# Altium PCB 64 Electrode Wafer.PcbDoc
Units mm, origin at the board's own origin, x right, y up, seen from the top; angles counter-clockwise.
Board outline 10 x 10 mm, 2 copper layers (Top Layer, Bottom Layer); 2 components, 65 nets, 130 pads, 0 vias.
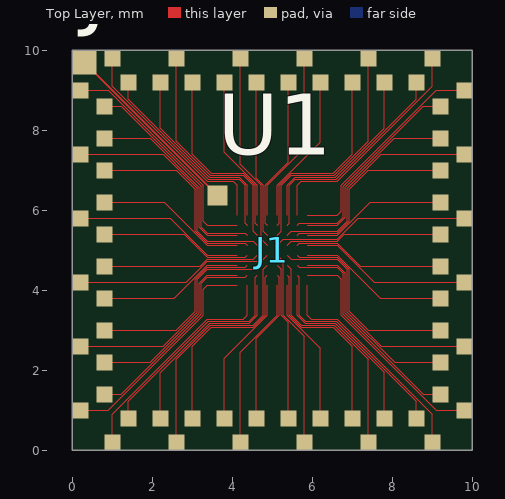
[diagram p0: Top Layer view]
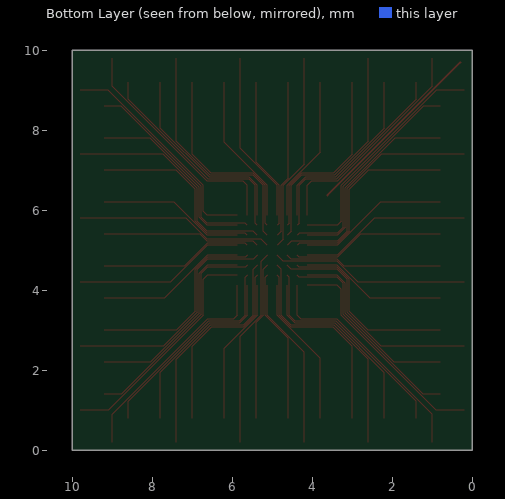
[diagram p1: Bottom Layer view, seen from below]

## Layer stack, top to bottom
Top Solder: solder mask 0.0102, Solder Resist, Dk 3.5
Top Layer: signal copper 0.0356
Dielectric 1: dielectric 0.32, FR-4, Dk 4.8
Bottom Layer: signal copper 0.0356
Bottom Solder: solder mask 0.0102, Solder Resist, Dk 3.5

## Board outline
0,0 10,0 10,10 0,10

## Design rules (kind name [scope] priority, off if disabled: settings)
Clearance [All] p1: gap=0.254 ignorepadtopadclearanceinfootprint=TRUE except(0: Arc-Hole Track-Hole SMDPad-Hole THPad-Hole Via-Hole Fill-Hole Poly-Hole Region-Hole Text-Hole; 0.005: Arc-Arc Arc-Track Arc-SMDPad Track-Track Track-SMDPad)
ComponentClearance [All] p1: gap=0 collisioncheckmode=3 verticalgap=0 showdistances=FALSE
PolygonConnect [All] p1: connectstyle=Relief reliefconductorwidth=0.254 reliefentries=4 polygonreliefangle="90 Angle" airgapwidth=0.254
RoutingVias [All] p1: holewidth=0.711 width=1.27 viastyle="Through Hole" minholewidth=0.711 minwidth=1.27 maxholewidth=0.711 maxwidth=1.27
SolderMaskExpansion [All] p1: expansion=0.102 istentingtop=FALSE
Width [All] p1: maxlimit=0.1 minlimit=0.006 preferedwidth=0.006 bottomlayer_maxwidth=0.006 minimp=50.000000 maximp=50.000000 favimp=50.000000
29 further rules are at their usual default settings.

## Components (designator, comment, footprint, x,y, rotation, side; value= is the part's Value field where it differs from the comment)
J1 "Bond Pads (64)" "Bond Pads (64)" 0,0 r0 top
U1 "Sensing Electrodes (64)" "Sensing Area (64)" 4.125,5.875 r0 top

## Footprints (in the part's own frame and the unit in brackets; to place one, negate y for a bottom-side part, rotate by r counter-clockwise, add the part's x,y. Pads: shape width x height; smd on the part's side, far side on the other; paste and mask are expansions set on the pad)
"Bond Pads (64)" [mm]
  rect 0.4x0.4 smd mask+0: 1(1,9.8) 2(1.4,9.2) 3(2.2,9.2) 4(2.6,9.8) 5(3,9.2) 6(3.8,9.2) 7(4.2,9.8) 8(4.6,9.2) 9(5.4,9.2) 10(5.8,9.8) 11(6.2,9.2) 12(7,9.2) 13(7.4,9.8) 14(7.8,9.2) 15(8.6,9.2) 16(9,9.8) 17(9.8,9) 18(9.2,8.6) 19(9.2,7.8) 20(9.8,7.4) 21(9.2,7) 22(9.2,6.2) 23(9.8,5.8) 24(9.2,5.4) 25(9.2,4.6) 26(9.8,4.2) 27(9.2,3.8) 28(9.2,3) 29(9.8,2.6) 30(9.2,2.2) 31(9.2,1.4) 32(9.8,1) 33(9,0.2) 34(8.6,0.8) 35(7.8,0.8) 36(7.4,0.2) 37(7,0.8) 38(6.2,0.8) 39(5.8,0.2) 40(5.4,0.8) 41(4.6,0.8) 42(4.2,0.2) 43(3.8,0.8) 44(3,0.8) 45(2.6,0.2) 46(2.2,0.8) 47(1.4,0.8) 48(1,0.2) 49(0.2,1) 50(0.8,1.4) 51(0.8,2.2) 52(0.2,2.6) 53(0.8,3) 54(0.8,3.8) 55(0.2,4.2) 56(0.8,4.6) 57(0.8,5.4) 58(0.2,5.8) 59(0.8,6.2) 60(0.8,7) 61(0.2,7.4) 62(0.8,7.8) 63(0.8,8.6) 64(0.2,9)
  rect 0.6x0.6 smd mask+0: 65(0.3,9.7)
"Sensing Area (64)" [mm]
  round 0.01 smd mask+0.102: 1(0,0) 2(0.25,0) 3(0.5,0) 4(0.75,0) 5(1,0) 6(1.25,0) 7(1.5,0) 8(1.75,0) 9(0,-0.25) 10(0.25,-0.25) 11(0.5,-0.25) 12(0.75,-0.25) 13(1,-0.25) 14(1.25,-0.25) 15(1.5,-0.25) 16(1.75,-0.25) 17(0,-0.5) 18(0.25,-0.5) 19(0.5,-0.5) 20(0.75,-0.5) 21(1,-0.5) 22(1.25,-0.5) 23(1.5,-0.5) 24(1.75,-0.5) 25(0,-0.75) 26(0.25,-0.75) 27(0.5,-0.75) 28(0.75,-0.75) 29(1,-0.75) 30(1.25,-0.75) 31(1.5,-0.75) 32(1.75,-0.75) 33(0,-1) 34(0.25,-1) 35(0.5,-1) 36(0.75,-1) 37(1,-1) 38(1.25,-1) 39(1.5,-1) 40(1.75,-1) 41(0,-1.25) 42(0.25,-1.25) 43(0.5,-1.25) 44(0.75,-1.25) 45(1,-1.25) 46(1.25,-1.25) 47(1.5,-1.25) 48(1.75,-1.25) 49(0,-1.5) 50(0.25,-1.5) 51(0.5,-1.5) 52(0.75,-1.5) 53(1,-1.5) 54(1.25,-1.5) 55(1.5,-1.5) 56(1.75,-1.5) 57(0,-1.75) 58(0.25,-1.75) 59(0.5,-1.75) 60(0.75,-1.75) 61(1,-1.75) 62(1.25,-1.75) 63(1.5,-1.75) 64(1.75,-1.75)
  rect 0.5x0.5 smd mask+0.102: 65(-0.5,0.5)

## Part data
J1: "64 bond pads for 64 channel wafer", Part Number="Bond Pads (64)"
U1: library part "64 Electrode Sensing Area", "64 Electrodes covering a 2 mm by 2 mm sensing area", Part Number="64 Electrode Sensing Area"

## Nets (pads, with @x,y where several pads share a name; then routed paths per layer and width w, separated by ;. In a path a pad name is that pad's centre, name@x,y a point inside that pad or via, vN(x,y) a via of type N, cw(c..) or ccw(c..) an arc to the next point about the centre after c; other vN are vias at no path point)
NetJ1_1: J1.1 U1.1 | length 5.6
  Top Layer w0.006: J1.1 1,9.1 3.375,6.725 4.025,6.725 4.125,6.625 U1.1
NetJ1_2: J1.3 U1.2 | length 4.7
  Top Layer w0.006: J1.3 2.2,8.05 3.425,6.825 4.175,6.825 4.375,6.625 U1.2
NetJ1_3: J1.6 U1.3 | length 3.7
  Top Layer w0.006: J1.6 3.8,7.45 4.625,6.625 U1.3
NetJ1_4: J1.10 U1.4 | length 4.3
  Top Layer w0.006: U1.4 4.875,6.623 5.8,7.548 5.8,9.55 J1.10
NetJ1_5: J1.11 U1.5 | length 3.8
  Top Layer w0.006: U1.5 5.125,6.625 6.2,7.7 J1.11
NetJ1_6: J1.14 U1.6 | length 4.9
  Top Layer w0.006: U1.6 5.375,6.625 5.575,6.825 6.57,6.825 7.8,8.055 J1.14
NetJ1_7: J1.16 U1.7 | length 5.9
  Top Layer w0.006: U1.7 5.625,6.625 5.725,6.725 6.625,6.725 9,9.1 J1.16
NetJ1_8: J1.17 U1.8 | length 5.6
  Top Layer w0.006: U1.8 6.625,5.875 6.725,5.975 6.725,6.625 9.1,9 J1.17
NetJ1_9: J1.64 U1.9 | length 5.9
  Top Layer w0.006: J1.64 0.9,9 3.275,6.625 3.275,5.725 3.375,5.625 U1.9
NetJ1_10: J1.2 U1.10 | length 5.3
  Top Layer w0.006: J1.2 1.4,8.775 3.4,6.775 4.175,6.775 4.325,6.625 4.325,5.675 U1.10
NetJ1_11: J1.5 U1.11 | length 4.7
  Top Layer w0.006: J1.5 3,7.4 3.475,6.925 4.275,6.925 4.575,6.625 4.575,5.675 U1.11
NetJ1_12: J1.9 U1.12 | length 3.8
  Top Layer w0.006: U1.12 4.825,5.675 4.825,6.625 5.4,7.2 J1.9
NetJ1_13: J1.12 U1.13 | length 5
  Top Layer w0.006: U1.13 5.175,5.675 5.175,6.625 5.475,6.925 6.525,6.925 7,7.4 J1.12
NetJ1_14: J1.15 U1.14 | length 5.5
  Top Layer w0.006: U1.14 5.425,5.675 5.425,6.625 5.575,6.775 6.6,6.775 8.6,8.775 J1.15
NetJ1_15: J1.18 U1.15 | length 5.3
  Top Layer w0.006: U1.15 5.675,5.675 6.625,5.675 6.775,5.825 6.775,6.6 8.775,8.6 J1.18
NetJ1_16: J1.19 U1.16 | length 4.7
  Top Layer w0.006: U1.16 6.625,5.625 6.825,5.825 6.825,6.575 8.05,7.8 J1.19
NetJ1_17: J1.62 U1.17 | length 4.9
  Top Layer w0.006: J1.62 1.945,7.8 3.175,6.57 3.175,5.575 3.375,5.375 U1.17
NetJ1_18: J1.63 U1.18 | length 5.5
  Top Layer w0.006: J1.63 1.225,8.6 3.225,6.6 3.225,5.575 3.375,5.425 4.325,5.425 U1.18
NetJ1_19: J1.4 U1.19 | length 5.7
  Top Layer w0.006: J1.4 2.6,7.725 3.45,6.875 4.275,6.875 4.525,6.625 4.525,5.475 U1.19
NetJ1_20: J1.8 U1.20 | length 3.9
  Top Layer w0.006: J1.8 4.6,6.8 4.775,6.625 4.775,5.475 U1.20
NetJ1_21: J1.13 U1.21 | length 6
  Top Layer w0.006: U1.21 5.225,5.475 5.225,6.625 5.475,6.875 6.55,6.875 7.4,7.725 J1.13
NetJ1_22: J1.20 U1.22 | length 5.7
  Top Layer w0.006: U1.22 5.475,5.475 6.625,5.475 6.875,5.725 6.875,6.55 7.725,7.4 J1.20
NetJ1_23: J1.21 U1.23 | length 4.7
  Top Layer w0.006: U1.23 5.675,5.425 6.625,5.425 6.925,5.725 6.925,6.525 7.4,7 J1.21
NetJ1_24: J1.22 U1.24 | length 3.7
  Top Layer w0.006: U1.24 6.625,5.375 7.45,6.2 J1.22
NetJ1_25: J1.59 U1.25 | length 3.8
  Top Layer w0.006: J1.59 2.3,6.2 3.375,5.125 U1.25
NetJ1_26: J1.60 U1.26 | length 5
  Top Layer w0.006: J1.60 1.04,7 2.6,7 3.075,6.525 3.075,5.475 3.375,5.175 4.325,5.175 U1.26
NetJ1_27: J1.61 U1.27 | length 6
  Top Layer w0.006: J1.61 2.275,7.4 3.125,6.55 3.125,5.475 3.375,5.225 4.525,5.225 U1.27
NetJ1_28: J1.7 U1.28 | length 5
  Top Layer w0.006: J1.7 4.2,7.15 4.725,6.625 4.725,5.275 U1.28
NetJ1_29: J1.23 U1.29 | length 5
  Top Layer w0.006: U1.29 5.275,5.275 6.625,5.275 7.15,5.8 J1.23
NetJ1_30: J1.24 U1.30 | length 3.9
  Top Layer w0.006: U1.30 5.475,5.225 6.625,5.225 6.8,5.4 J1.24
NetJ1_31: J1.25 U1.31 | length 3.8
  Top Layer w0.006: U1.31 5.675,5.175 6.625,5.175 7.2,4.6 J1.25
NetJ1_32: J1.26 U1.32 | length 4.3
  Top Layer w0.006: U1.32 6.623,5.125 7.548,4.2 9.55,4.2 J1.26
NetJ1_33: J1.58 U1.33 | length 4.3
  Top Layer w0.006: J1.58 0.45,5.8 2.452,5.8 3.377,4.875 U1.33
NetJ1_34: J1.57 U1.34 | length 3.8
  Top Layer w0.006: J1.57 2.8,5.4 3.375,4.825 4.325,4.825 U1.34
NetJ1_35: J1.56 U1.35 | length 3.9
  Top Layer w0.006: J1.56 3.2,4.6 3.375,4.775 4.525,4.775 U1.35
NetJ1_36: J1.55 U1.36 | length 5
  Top Layer w0.006: J1.55 2.85,4.2 3.375,4.725 4.725,4.725 U1.36
NetJ1_37: J1.39 U1.37 | length 5
  Top Layer w0.006: U1.37 5.275,4.725 5.275,3.375 5.8,2.85 J1.39
NetJ1_38: J1.29 U1.38 | length 6
  Top Layer w0.006: U1.38 5.475,4.775 6.625,4.775 6.875,4.525 6.875,3.45 7.725,2.6 J1.29
NetJ1_39: J1.28 U1.39 | length 5
  Top Layer w0.006: U1.39 5.675,4.825 6.625,4.825 6.925,4.525 6.925,3.475 7.4,3 8.96,3 J1.28
NetJ1_40: J1.27 U1.40 | length 3.8
  Top Layer w0.006: U1.40 6.625,4.875 7.7,3.8 J1.27
NetJ1_41: J1.54 U1.41 | length 3.7
  Top Layer w0.006: J1.54 2.55,3.8 3.375,4.625 U1.41
NetJ1_42: J1.53 U1.42 | length 4.7
  Top Layer w0.006: J1.53 2.6,3 3.075,3.475 3.075,4.275 3.375,4.575 4.325,4.575 U1.42
NetJ1_43: J1.52 U1.43 | length 5.7
  Top Layer w0.006: J1.52 2.275,2.6 3.125,3.45 3.125,4.275 3.375,4.525 4.525,4.525 U1.43
NetJ1_44: J1.45 U1.44 | length 6
  Top Layer w0.006: J1.45 2.6,2.275 3.45,3.125 4.525,3.125 4.775,3.375 4.775,4.525 U1.44
NetJ1_45: J1.40 U1.45 | length 3.9
  Top Layer w0.006: U1.45 5.225,4.525 5.225,3.375 5.4,3.2 J1.40
NetJ1_46: J1.36 U1.46 | length 5.7
  Top Layer w0.006: U1.46 5.475,4.525 5.475,3.375 5.725,3.125 6.55,3.125 7.4,2.275 J1.36
NetJ1_47: J1.31 U1.47 | length 5.5
  Top Layer w0.006: U1.47 5.675,4.575 6.625,4.575 6.775,4.425 6.775,3.4 8.775,1.4 J1.31
NetJ1_48: J1.30 U1.48 | length 4.9
  Top Layer w0.006: U1.48 6.625,4.625 6.825,4.425 6.825,3.43 8.055,2.2 J1.30
NetJ1_49: J1.51 U1.49 | length 4.7
  Top Layer w0.006: J1.51 1.95,2.2 3.175,3.425 3.175,4.175 3.375,4.375 U1.49
NetJ1_50: J1.50 U1.50 | length 5.3
  Top Layer w0.006: J1.50 1.225,1.4 3.225,3.4 3.225,4.175 3.375,4.325 4.325,4.325 U1.50
NetJ1_51: J1.47 U1.51 | length 5.5
  Top Layer w0.006: J1.47 1.4,1.225 3.4,3.225 4.425,3.225 4.575,3.375 4.575,4.325 U1.51
NetJ1_52: J1.44 U1.52 | length 5
  Top Layer w0.006: J1.44 3,1.04 3,2.6 3.475,3.075 4.525,3.075 4.825,3.375 4.825,4.325 U1.52
NetJ1_53: J1.41 U1.53 | length 3.8
  Top Layer w0.006: J1.41 4.6,2.8 5.175,3.375 5.175,4.325 U1.53
NetJ1_54: J1.37 U1.54 | length 4.7
  Top Layer w0.006: U1.54 5.425,4.325 5.425,3.375 5.725,3.075 6.525,3.075 7,2.6 J1.37
NetJ1_55: J1.34 U1.55 | length 5.3
  Top Layer w0.006: U1.55 5.675,4.325 5.675,3.375 5.825,3.225 6.6,3.225 8.6,1.225 J1.34
NetJ1_56: J1.32 U1.56 | length 5.9
  Top Layer w0.006: U1.56 6.625,4.375 6.725,4.275 6.725,3.375 9.1,1 J1.32
NetJ1_57: J1.49 U1.57 | length 5.6
  Top Layer w0.006: J1.49 0.9,1 3.275,3.375 3.275,4.025 3.375,4.125 U1.57
NetJ1_58: J1.48 U1.58 | length 5.9
  Top Layer w0.006: J1.48 1,0.9 3.375,3.275 4.275,3.275 4.375,3.375 U1.58
NetJ1_59: J1.46 U1.59 | length 4.9
  Top Layer w0.006: J1.46 2.2,1.945 3.43,3.175 4.425,3.175 4.625,3.375 U1.59
NetJ1_60: J1.43 U1.60 | length 3.8
  Top Layer w0.006: J1.43 3.8,2.3 4.875,3.375 U1.60
NetJ1_61: J1.42 U1.61 | length 4.3
  Top Layer w0.006: J1.42 4.2,0.45 4.2,2.452 5.125,3.377 U1.61
NetJ1_62: J1.38 U1.62 | length 3.7
  Top Layer w0.006: U1.62 5.375,3.375 6.2,2.55 J1.38
NetJ1_63: J1.35 U1.63 | length 4.7
  Top Layer w0.006: U1.63 5.625,3.375 5.825,3.175 6.575,3.175 7.8,1.95 J1.35
NetJ1_64: J1.33 U1.64 | length 5.6
  Top Layer w0.006: U1.64 5.875,3.375 5.975,3.275 6.625,3.275 9,0.9 J1.33
NetJ1_65: J1.65 U1.65 | length 4.7
  Top Layer w0.05: J1.65 U1.65